# Altium PCB STM32F303VCT6_PLC.PcbDoc (part 2 of 3)
Units mm, origin at the board's own origin, x right, y up, seen from the top; angles counter-clockwise.
Board outline 150 x 150 mm, 4 copper layers ([L1] TOP, [L2] GND, [L3] POWER, [L4] BOTTOM), stack 1.58 mm thick; 269 components, 235 nets, 934 pads, 331 vias.
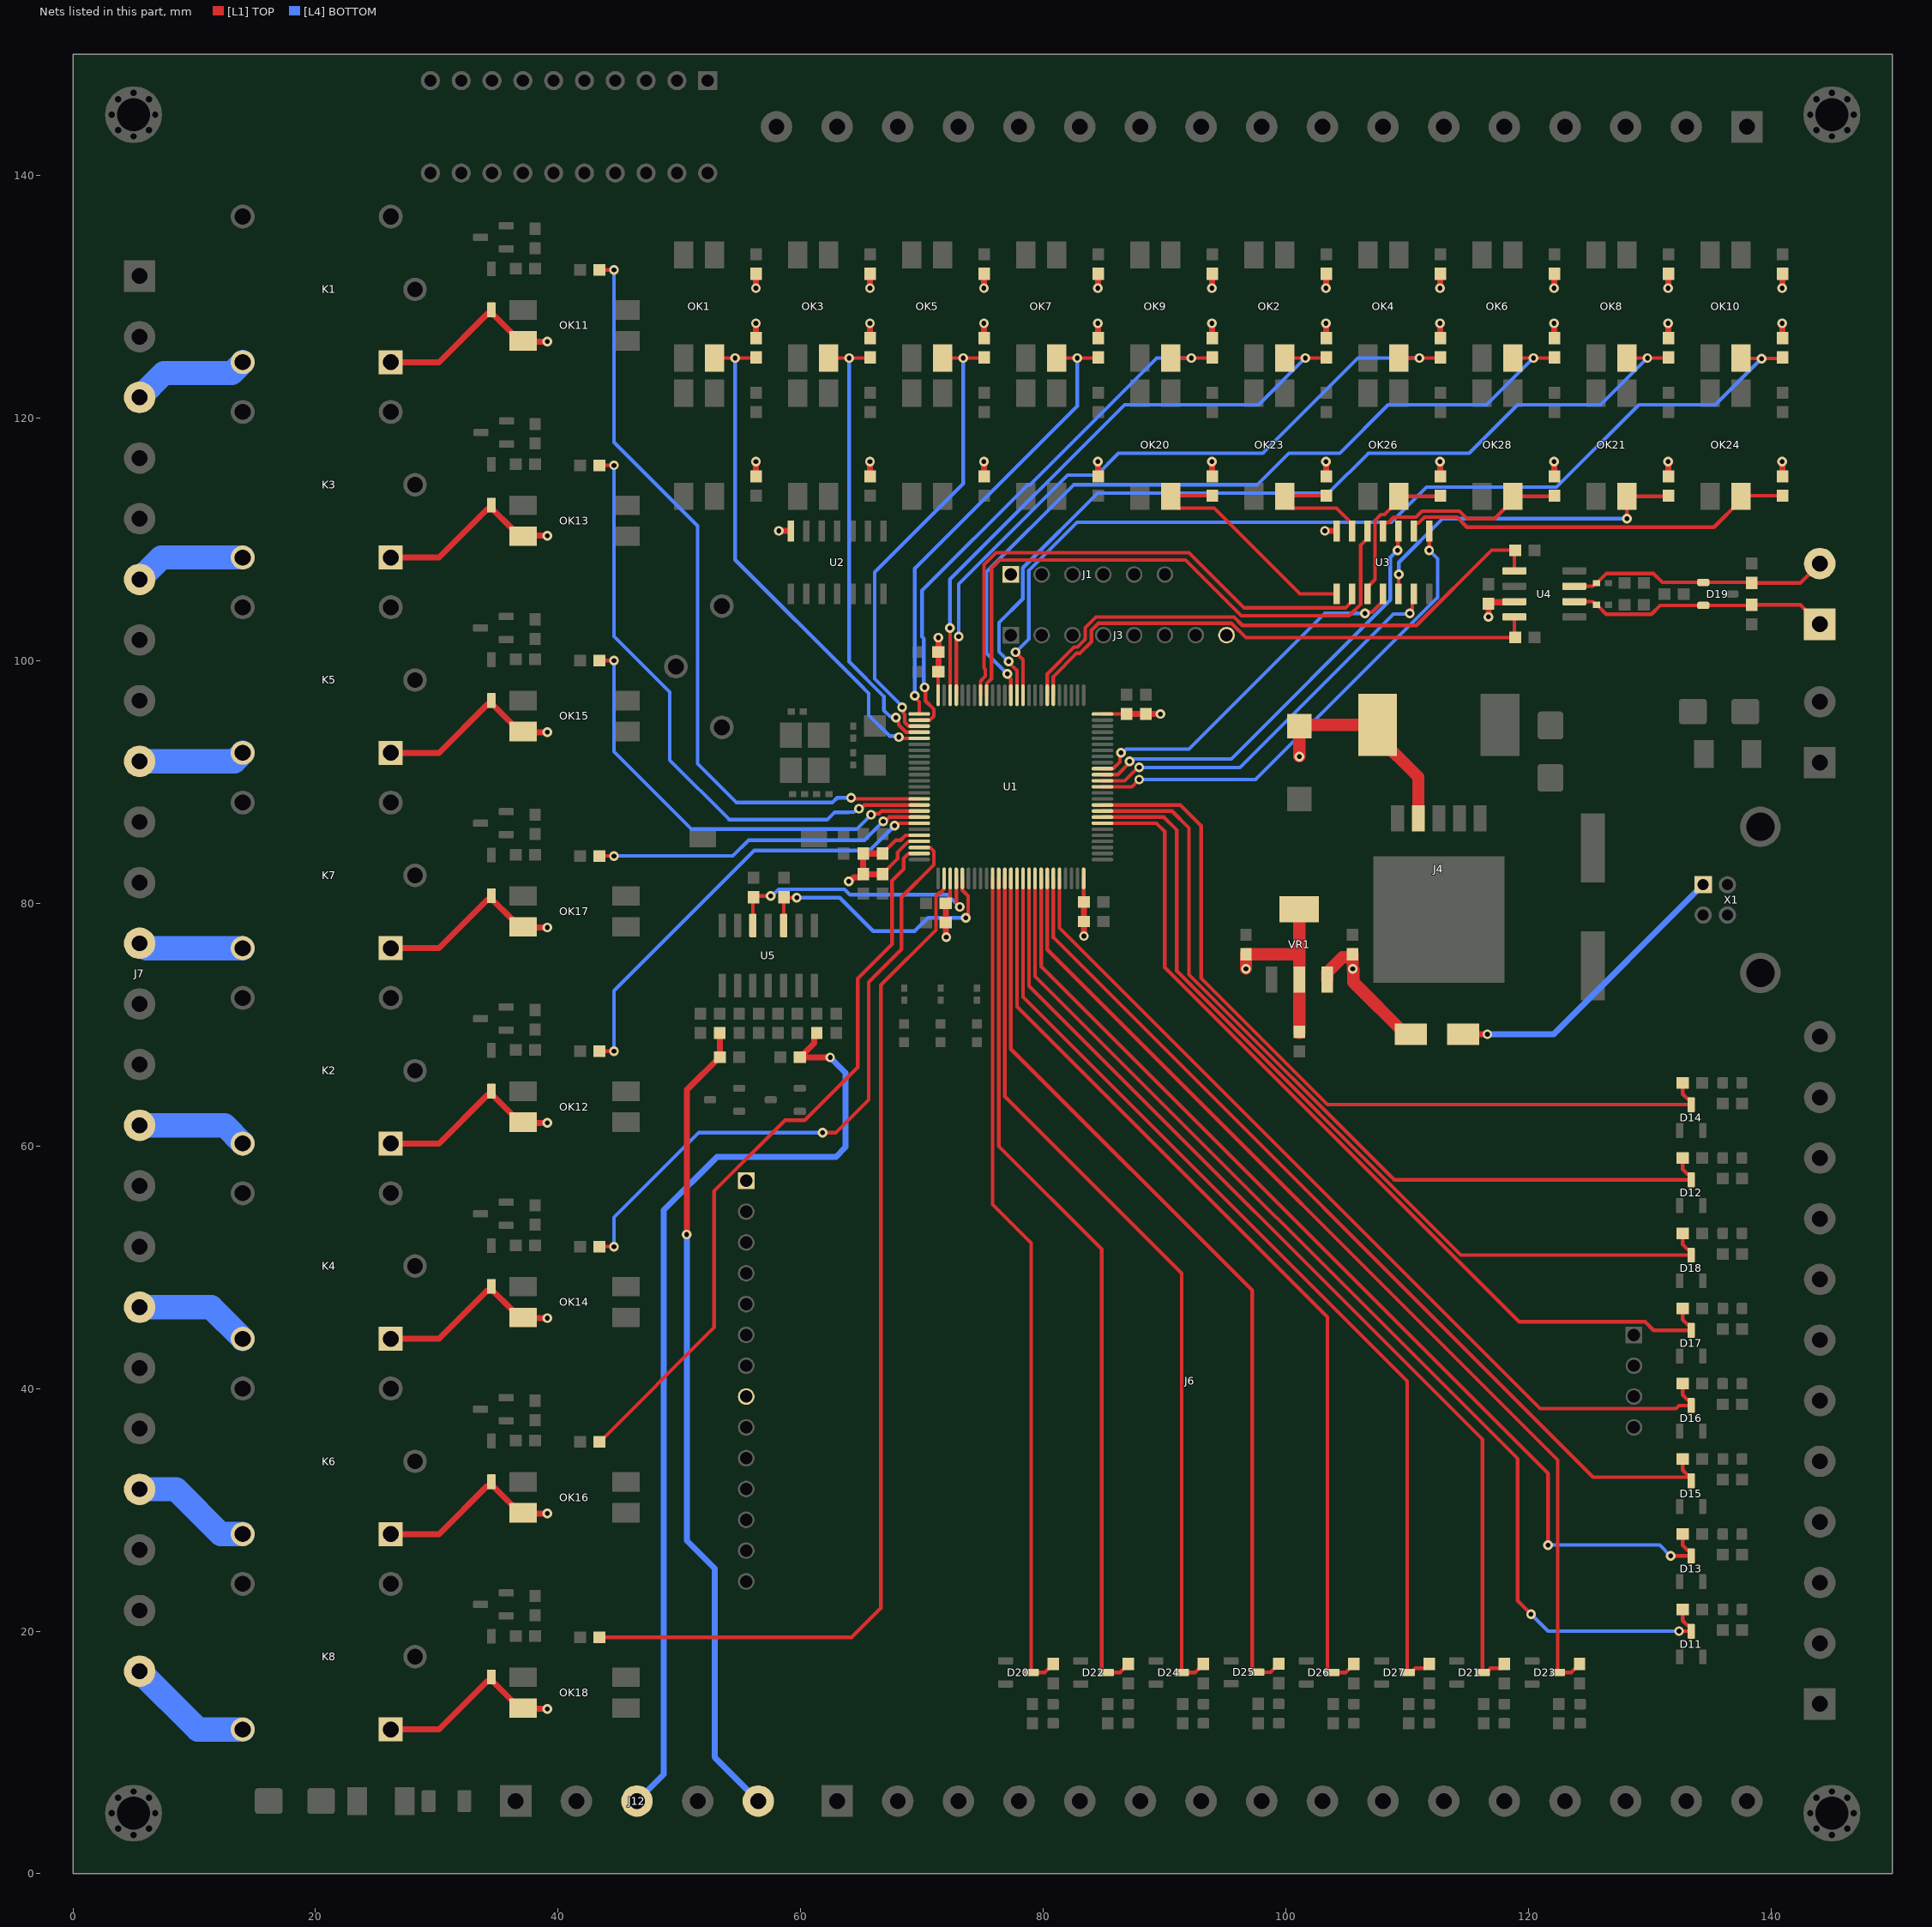
[diagram p4: the nets of this part, all layers, seen from the top]

## Part data
BT1: "THM (Vertical) Holder for 20mm Cel", Package=None, Check_prices=https://www.snapeda.com/parts/1074/Keystone/view-part/?ref=eda, MF="Keystone Electronics", MP=1074, SnapEDA_Link=https://www.snapeda.com/parts/1074/Keystone/view-part/?ref=snap
C1 C3 C5 C7 C17 C29 C30: "CAP, CERM, 100 nF, 25 V, +/- 10%, X7R, AEC-Q200 Grade 1, 0603", Cap_Case=0603, Manufacturer=MuRata, PartNumber=GCM188R70J225KE22D, Supplier Part Number 1=490-5316-1-ND, TempCo=X7R, Tolerance_%=10%, Value1=Unknown, Value2=6.3V, ValueDisplayed=100nF, AEC Category=Q200, AEC Grade=1, AEC Qualified=Y, Cap_F=2.2µF, ComponentLink1Description="Datasheet link", ComponentLink1URL=http://psearch.en.murata.com/capacitor/product/GCM188R70J225KE22%23.pdf, CompType=Capacitor, LatestRevisionDate=2017-03-09, MountType=SMT, PackageReference=0603, Polarized=N, Published=2008-06-19, Publisher="Texas Instruments", RoHS=Y, SizeArea_mm2=1.28, SizeAreaWB_mm2=4.68, SizeX_mm=1.6, SizeY_mm=0.8, SizeZ_mm=1, Supplier 1=Digi-Key, Supplier 2=Mouser, Supplier Part Number 2=81-GCM188R70J225KE2D, TaMax_C=125°C, TaMin_C=-55°C, Technology=Ceramic, U/M=EA, VDC_V=6.3V
C2 C4 C6 C8: "CAP, CERM, 4.7 uF, 10 V, +/- 10%, X7R, AEC-Q200 Grade 1, 0603", Cap_Case=0603, Manufacturer=MuRata, PartNumber=GCM188R70J225KE22D, Supplier Part Number 1=490-5316-1-ND, TempCo=X7R, Tolerance_%=10%, Value1=Unknown, Value2=6.3V, ValueDisplayed=4.7uF, AEC Category=Q200, AEC Grade=1, AEC Qualified=Y, Cap_F=2.2µF, ComponentLink1Description="Datasheet link", ComponentLink1URL=http://psearch.en.murata.com/capacitor/product/GCM188R70J225KE22%23.pdf, CompType=Capacitor, LatestRevisionDate=2017-03-09, MountType=SMT, PackageReference=0603, Polarized=N, Published=2008-06-19, Publisher="Texas Instruments", RoHS=Y, SizeArea_mm2=1.28, SizeAreaWB_mm2=4.68, SizeX_mm=1.6, SizeY_mm=0.8, SizeZ_mm=1, Supplier 1=Digi-Key, Supplier 2=Mouser, Supplier Part Number 2=81-GCM188R70J225KE2D, TaMax_C=125°C, TaMin_C=-55°C, Technology=Ceramic, U/M=EA, VDC_V=6.3V
C9 C10: library part "CAP 1uF 0603", "CAP, CERM, 1 uF, 16 V, +/- 10%, X7R, AEC-Q200 Grade 1, 0603", Cap_Case=0603, Manufacturer=MuRata, Supplier Part Number 1=490-5241-6-ND, TempCo=X7R, Tolerance_%=10%, Value1=Unknown, Value2=16V, ValueDisplayed=10uF, AEC Category=Q200, AEC Grade=1, AEC Qualified=Y, Cap_F=1µF, ComponentLink1Description="Datasheet link", ComponentLink1URL=http://psearch.en.murata.com/capacitor/product/GCM188R71C105KA64%23.pdf, CompType=Capacitor, LatestRevisionDate=2017-03-09, MountType=SMT, PackageReference=0603, PartNumber=GCM188R71C105KA64D, Polarized=N, Published=2008-06-19, Publisher="Texas Instruments", RoHS=Y, SizeArea_mm2=1.28, SizeAreaWB_mm2=4.68, SizeX_mm=1.6, SizeY_mm=0.8, SizeZ_mm=1, Supplier 1=Digi-Key, Supplier 2=Mouser, Supplier Part Number 2=81-GCM188R71C105K64D, TaMax_C=125°C, TaMin_C=-55°C, Technology=Ceramic, U/M=EA, VDC_V=16V
C11 C18: library part "CAP 10pF 0402 50V", "CAP, CERM, 10 pF, 50 V, +/- 5%, X7R, AEC-Q200 Grade 1, 0402", Cap_Case=0402, Manufacturer=TDK, Supplier Part Number 1=445-6899-1-ND, TempCo=X7R, Tolerance_%=10%, Value1="0.039064 ohm", Value2=50V, ValueDisplayed=10pF, AEC Category=Q200, AEC Grade=1, AEC Qualified=Y, Cap_F=100nF, ComponentLink1Description="Datasheet link", ComponentLink1URL=https://product.tdk.com/en/search/capacitor/ceramic/mlcc/info?part_no=CGA2B3X7R1H104K050BB, CompType=Capacitor, ESR_ohm=0.039064, IRMS_A=8.14669dA, LatestRevisionDate=2017-03-09, MountType=SMT, PackageReference=0402, PartNumber=CGA2B3X7R1H104K050BB, Polarized=N, Published=2008-06-19, Publisher="Texas Instruments", RoHS=Y, SizeArea_mm2=0.5, SizeAreaWB_mm2=3, SizeX_mm=1, SizeY_mm=0.5, SizeZ_mm=0.6, Supplier 1=Digi-Key, Supplier 2=Newark, Supplier 3=Mouser, Supplier Part Number 2=04X3148, Supplier Part Number 3=810-CGA2B3X7R1H104K, TaMax_C=125°C, TaMin_C=-55°C, Technology=Ceramic, U/M=EA, VDC_V=50V
C12 C19: library part "CAP 4.7pF 0402", "CAP, CERM, 4.7 pF, 50 V, +/- 2%, C0G/NP0, 0402", Cap_Case=0402, Manufacturer=MuRata, Supplier Part Number 1=490-8102-1-ND, TempCo=C0G/NP0, Tolerance_%=2%, Value1=Unknown, Value2=50V, ValueDisplayed=4.7pF, AEC Category=Q200, AEC Grade=N/A, AEC Qualified=N, Cap_F=4.7pF, ComponentLink1Description="Datasheet link", ComponentLink1URL=http://psearch.murata.com/capacitor/product/GJM1555C1H4R7BB01%23.pdf, CompType=Capacitor, LatestRevisionDate=2017-03-09, MountType=SMT, PackageReference=0402, PartNumber=GJM1555C1H4R7BB01D, Polarized=N, Published=2008-06-19, Publisher="Texas Instruments", RoHS=Y, SizeArea_mm2=0.5, SizeAreaWB_mm2=3, SizeX_mm=1, SizeY_mm=0.5, SizeZ_mm=0.6, Supplier 1=Digi-Key, Supplier 2=Mouser, Supplier Part Number 2=81-GJM1555C1H4R7BB01, TaMax_C=125°C, TaMin_C=-55°C, Technology=Ceramic, U/M=EA, VDC_V=50V
C13 C15 C22 C23 C24 C25 C26 C27: "CAP, CERM, 10 nF, 50 V, +/- 10%, X7R, AEC-Q200 Grade 1, 0603", Cap_Case=0603, Manufacturer=MuRata, PartNumber=GCM188R70J225KE22D, Supplier Part Number 1=490-5316-1-ND, TempCo=X7R, Tolerance_%=10%, Value1=Unknown, Value2=6.3V, ValueDisplayed=10nF, AEC Category=Q200, AEC Grade=1, AEC Qualified=Y, Cap_F=2.2µF, ComponentLink1Description="Datasheet link", ComponentLink1URL=http://psearch.en.murata.com/capacitor/product/GCM188R70J225KE22%23.pdf, CompType=Capacitor, LatestRevisionDate=2017-03-09, MountType=SMT, PackageReference=0603, Polarized=N, Published=2008-06-19, Publisher="Texas Instruments", RoHS=Y, SizeArea_mm2=1.28, SizeAreaWB_mm2=4.68, SizeX_mm=1.6, SizeY_mm=0.8, SizeZ_mm=1, Supplier 1=Digi-Key, Supplier 2=Mouser, Supplier Part Number 2=81-GCM188R70J225KE2D, TaMax_C=125°C, TaMin_C=-55°C, Technology=Ceramic, U/M=EA, VDC_V=6.3V
C14 C16: library part "CAP 1uF 0603", "CAP, CERM, 1 uF, 16 V, +/- 10%, X7R, AEC-Q200 Grade 1, 0603", Cap_Case=0603, Manufacturer=MuRata, Supplier Part Number 1=490-5241-6-ND, TempCo=X7R, Tolerance_%=10%, Value1=Unknown, Value2=16V, ValueDisplayed=1uF, AEC Category=Q200, AEC Grade=1, AEC Qualified=Y, Cap_F=1µF, ComponentLink1Description="Datasheet link", ComponentLink1URL=http://psearch.en.murata.com/capacitor/product/GCM188R71C105KA64%23.pdf, CompType=Capacitor, LatestRevisionDate=2017-03-09, MountType=SMT, PackageReference=0603, PartNumber=GCM188R71C105KA64D, Polarized=N, Published=2008-06-19, Publisher="Texas Instruments", RoHS=Y, SizeArea_mm2=1.28, SizeAreaWB_mm2=4.68, SizeX_mm=1.6, SizeY_mm=0.8, SizeZ_mm=1, Supplier 1=Digi-Key, Supplier 2=Mouser, Supplier Part Number 2=81-GCM188R71C105K64D, TaMax_C=125°C, TaMin_C=-55°C, Technology=Ceramic, U/M=EA, VDC_V=16V
C20: library part "CAP ALUMINUM", "CAPACITOR ALUM ELEC, 330UF, 20%, 35V, SMD; Product Range:PANASONIC - TK Series; Capacitance:330ÂµF; Capacitance Tolerance:Â± 20%; Capacitor Case Style:SMD; Diameter:12.5mm; ESR:0.12ohm; Height:13.5mm; Operating Temperature Max:125Â°C ;RoHS Compliant: Yes", Package="RADIAL-2 Panasonic", Availability="No availability data", Check_prices=https://www.snapeda.com/parts/EEETK1V331AQ/Panasonic/view-part/5787067/?ref=eda, MF=Panasonic, MP=EEETK1V331AQ, Price=None, SnapEDA_Link=https://www.snapeda.com/parts/EEETK1V331AQ/Panasonic/view-part/5787067/?ref=snap
C21: library part "CAP ALUMINUM 8X10.5MM", "Aluminum Electrolytic Capacitors, FT-V (????????) Series, 470uF +/- 20%, 25V, Surface mount type(8x10.5mm) Vibration-proof product", Package="RADIAL-2 Panasonic", Check_prices=https://www.snapeda.com/parts/EEE-FT1E471AV/Panasonic/view-part/?ref=eda, MF=Panasonic, MP=EEE-FT1E471AV, SnapEDA_Link=https://www.snapeda.com/parts/EEE-FT1E471AV/Panasonic/view-part/?ref=snap
C28: library part "CAP 10uF 1206", Cap_Case=1210, Manufacturer=TDK, Supplier Part Number 1=445-5720-1-ND, TempCo=X7R, Tolerance_%=20%, Value1=Unknown, Value2=25V, ValueDisplayed=10uF, AEC Category=Q200, AEC Grade=1, AEC Qualified=Y, Cap_F=10µF, ComponentLink1Description="Datasheet link", ComponentLink1URL=http://product.tdk.com/en/catalog/datasheets/mlcc_automotive_general_en.pdf, CompType=Capacitor, LatestRevisionDate=2017-03-09, MountType=SMT, PackageReference=1210, PartNumber=CGA6P1X7R1E106M250AC, Polarized=N, Published=2008-06-19, Publisher="Texas Instruments", RoHS=Y, SizeArea_mm2=8, SizeAreaWB_mm2=14.7, SizeX_mm=3.2, SizeY_mm=2.5, SizeZ_mm=2.8, Supplier 1=Digi-Key, Supplier 2=Mouser, Supplier Part Number 2=810-CGA6P1X7R1E106M, TaMax_C=125°C, TaMin_C=-55°C, Technology=Ceramic, U/M=EA, VDC_V=25V
D1 D28: "Diode Schottky 40V 2A Surface Mount DO-214AA (SMB)", Package="DO-214AA ON Semiconductor", Availability="In Stock", Check_prices=https://www.snapeda.com/parts/SS24/Onsemi/view-part/?ref=eda, MF="ON Semiconductor", MP=SS24, Price=None, SnapEDA_Link=https://www.snapeda.com/parts/SS24/Onsemi/view-part/?ref=snap
D2: library part SS24, "Diode Schottky 40V 2A Surface Mount DO-214AA (SMB)", Package="DO-214AA ON Semiconductor", Availability="In Stock", Check_prices=https://www.snapeda.com/parts/SS24/Onsemi/view-part/?ref=eda, MF="ON Semiconductor", MP=SS24, Price=None, SnapEDA_Link=https://www.snapeda.com/parts/SS24/Onsemi/view-part/?ref=snap
D3 D4 D5 D6 D7 D8 D9 D10: "Diode Standard 100 V 300mA (DC) Surface Mount SOD-123", Package="SOD-123 Fairchild Semiconductor", Check_prices=https://www.snapeda.com/parts/1N4148W-7/Diodes+Inc./view-part/?ref=eda, MF="Diodes Inc.", MP=1N4148W-7, SnapEDA_Link=https://www.snapeda.com/parts/1N4148W-7/Diodes+Inc./view-part/?ref=snap
D11 D12 D13 D14 D15 D16 D17 D18 D20 D21 D22 D23 D24 D25 D26 D27 J1 J3: Package=None, Availability=Unavailable, Price=None
  D11 D12 D13 D14 D15 D16 D17 D18 D20 D21 D22 D23 D24 D25 D26 D27: MP=BZX84C10LT1G
  J1: MF="Samtec Inc.", MP=TSW-106-07-L-S
  J3: MF="Samtec Inc.", MP=TSW-108-07-L-S
D19: library part PESD5V0L2BT,215
DS1 DS2 DS3: library part "LED RED SMD", "LED, Red, SMD", Color=Red, Manufacturer=OSRAM, Value1=W, Value2=1.8V, Angle=160, ComponentLink1Description="Datasheet link", ComponentLink1URL=http://www.osram-os.com/Graphics/XPic2/00077099_0.pdf, CompType=LED, Io_A=20mA, MountType=SMT, PackageReference="SMD, 2-Leads, Body 1.3x0.8mm", PartNumber="LS L29K-G1J2-1-Z", RoHS=Y, TJmax_C=110°C, Type=?, Vf_V=1.8V, Vr_V=12V
F1 F18: library part "FUSE 1808", "Fuse, 5 A, 32VAC/VDC, SMD", Irating_A=5A, Manufacturer=Littelfuse, Supplier Part Number 1=F1608CT-ND, ComponentLink1Description="Datasheet URL", ComponentLink1URL=http://www.littelfuse.com/~/media/electronics/datasheets/fuses/littelfuse_fuse_440_datasheet.pdf.pdf, CompType=Fuse, Interrupt_AC=50A, Interrupt_DC=50A, MeltingTyp=4.761, MountType=SMT, PackageReference=1206, PartNumber=0440005.WR, RoHS=Y, Rtyp_Ohm=0.012, SizeArea_mm2=5.12, SizeAreaWB_mm2=10.92, SizeX_mm=3.2, SizeY_mm=1.6, SizeZ_mm=1.35, Supplier 1=Digi-Key, Supplier 2=Newark, Supplier 3=Mouser, Supplier Part Number 2=64R8013, Supplier Part Number 3=576-0440005.WR, VAC_V=32V, VDC_V=32V
F2 F3 F4 F5 F6 F7 F8 F9 F10 F11 F12 F13 F14 F15 F16 F17: library part "Polyfuse 0603"
J2: "Diode Schottky 40 V 1A Surface Mount DO-214AC (SMA)", Package="SMA-2 ON Semiconductor", Check_prices=https://www.snapeda.com/parts/SS14/Onsemi/view-part/?ref=eda, MF=ON, MP=SS14, SnapEDA_Link=https://www.snapeda.com/parts/SS14/Onsemi/view-part/?ref=snap
J4: Package=Package, Check_prices=https://www.snapeda.com/parts/LM2596/Texas+Instruments/view-part/?ref=eda, MF="Texas Instruments", MP=LM2596, SnapEDA_Link=https://www.snapeda.com/parts/LM2596/Texas+Instruments/view-part/?ref=snap
J6: "LCD 2.4inch 240x320", Package=None, Availability=Unavailable, MF="Samtec Inc.", MP=TSW-108-07-L-S, Price=None
K1 K2 K3 K4 K5 K6 K7 K8: "5V Trigger Relay Module For Arduino And Raspberry Pi 5V Trigger Relay Module For Arduino And Raspberry Pi", Package="NON STANDARD-5 Songle Relay", Availability="Not in stock", Check_prices=https://www.snapeda.com/parts/SRD-05VDC-SL-C/Songle+Relay/view-part/?ref=eda, MF="Songle Relay", MP=SRD-05VDC-SL-C, Price=None, SnapEDA_Link=https://www.snapeda.com/parts/SRD-05VDC-SL-C/Songle+Relay/view-part/?ref=snap
L1: library part CDRH127_LDNP-221MC, "220 ÂµH Shielded - Inductor 1.45 A 338mOhm Max Nonstandard", Package="Nonstandard Sumida", Check_prices=https://www.snapeda.com/parts/CDRH127/LDNP-221MC/Sumida+America+Components+Inc./view-part/?ref=eda, MF="Sumida America", MP=CDRH127/LDNP-221MC, SnapEDA_Link=https://www.snapeda.com/parts/CDRH127/LDNP-221MC/Sumida+America+Components+Inc./view-part/?ref=snap
OK1 OK2 OK3 OK4 OK5 OK6 OK7 OK8 OK9 OK10 OK11 OK12 OK13 OK14 OK15 OK16 OK17 OK18 OK19 OK20 OK21 OK22 OK23 OK24 OK25 OK26 OK27 OK28: "RF Mixer IC Cellular, DCS, PCS, W-CDMA, WLAN Up Converter 50MHz ~ 400MHz 6-SuperMiniMold", Package=None, Check_prices=https://www.snapeda.com/parts/PC817/Renesas/view-part/?ref=eda, MF="Renesas Electronics America Inc", MP=PC817, SnapEDA_Link=https://www.snapeda.com/parts/PC817/Renesas/view-part/?ref=snap
Q1 Q2 Q3 Q4 Q5 Q6 Q7 Q8: "Mosfet Array 2 N-Channel (Dual) 60V 300mA 500mW Surface Mount PG-SOT363-6", Package="SOT-23-3 ON Semiconductor", Check_prices=https://www.snapeda.com/parts/2N7002/Onsemi/view-part/?ref=eda, MF=onsemi, MP=2N7002, SnapEDA_Link=https://www.snapeda.com/parts/2N7002/Onsemi/view-part/?ref=snap
R1: library part "RES 1.5K 0603 1%", "RES, 1.5K, 1%, 0.1 W, AEC-Q200 Grade 0, 0603", Manufacturer=Vishay-Dale, PartNumber=CRCW060320R0JNEA, Power_W=100mW, Supplier Part Number 1=541-20GCT-ND, TempCo="200 ppm/C", Tolerance_%=5%, Value2=0.1W, Value_Code=20R0, ValueDisplayed=1.5k, AEC Category=Q200, AEC Grade=0, AEC Qualified=Y, ComponentLink1Description="Datasheet link", ComponentLink1URL=http://www.vishay.com/docs/20035/dcrcwe3.pdf, CompType=Resistor, EIA_Code=E24, MountType=SMT, PackageReference=0603, Res_ohm=20, RoHS=E, SizeArea_mm2=1.28, SizeX_mm=1.6, SizeY_mm=0.8, SizeZ_mm=1, Supplier 1=Digi-Key, Supplier 2=Newark, Supplier 3=Mouser, Supplier Part Number 2=59M6784, Supplier Part Number 3=71-CRCW0603J-20-E3, Technology="Thick Film", Value1=5%, VDC_V=75V
R2: library part "RES 2K 0402", "RES, 2.00 k, 5%, 0.063 W, AEC-Q200 Grade 0, 0402", Manufacturer=Vishay-Dale, Power_W=63mW, Supplier Part Number 1=541-1.00KLCT-ND, TempCo="100 ppm/C", Tolerance_%=1%, Value2=0.063W, Value_Code=1k00, ValueDisplayed=2.00k, AEC Category=Q200, AEC Grade=0, AEC Qualified=Y, ComponentLink1Description="Datasheet link", ComponentLink1URL=http://www.vishay.com/docs/20035/dcrcwe3.pdf, CompType=Resistor, EIA_Code=E96, MountType=SMT, PackageReference=0402, PartNumber=CRCW04021K00FKED, Res_ohm=1k, RoHS=E, SizeArea_mm2=0.5, SizeX_mm=1, SizeY_mm=0.5, SizeZ_mm=0.6, Supplier 1=Digi-Key, Supplier 2=Newark, Supplier 3=Mouser, Supplier Part Number 2=52K6545, Supplier Part Number 3=71-CRCW0402-1.0K-E3, Technology="Thick Film", Value1=1%, VDC_V=50V
R3 R4 R5 R6 R7 R8 R9 R10 R11 R12 R13 R14 R15 R16 R17 R18 R19 R20 R21 R22: library part "RES 1.5K 0603 1%", "RES, 1.5K, 1%, 0.1 W, AEC-Q200 Grade 0, 0603", Manufacturer=Vishay-Dale, PartNumber=CRCW060320R0JNEA, Power_W=100mW, Supplier Part Number 1=541-20GCT-ND, TempCo="200 ppm/C", Tolerance_%=5%, Value2=0.1W, Value_Code=20R0, ValueDisplayed=1k, AEC Category=Q200, AEC Grade=0, AEC Qualified=Y, ComponentLink1Description="Datasheet link", ComponentLink1URL=http://www.vishay.com/docs/20035/dcrcwe3.pdf, CompType=Resistor, EIA_Code=E24, MountType=SMT, PackageReference=0603, Res_ohm=20, RoHS=E, SizeArea_mm2=1.28, SizeX_mm=1.6, SizeY_mm=0.8, SizeZ_mm=1, Supplier 1=Digi-Key, Supplier 2=Newark, Supplier 3=Mouser, Supplier Part Number 2=59M6784, Supplier Part Number 3=71-CRCW0603J-20-E3, Technology="Thick Film", Value1=5%, VDC_V=75V
R23 R24 R25 R26 R29 R30 R31 R32 R35 R36 R37 R38 R41 R42 R43 R44: library part "RES 10K 0603 1%", "RES, 10K, 1%, 0.1 W, AEC-Q200 Grade 0, 0603", Manufacturer=Vishay-Dale, PartNumber=CRCW060320R0JNEA, Power_W=100mW, Supplier Part Number 1=541-20GCT-ND, TempCo="200 ppm/C", Tolerance_%=5%, Value2=0.1W, Value_Code=20R0, ValueDisplayed=1k, AEC Category=Q200, AEC Grade=0, AEC Qualified=Y, ComponentLink1Description="Datasheet link", ComponentLink1URL=http://www.vishay.com/docs/20035/dcrcwe3.pdf, CompType=Resistor, EIA_Code=E24, MountType=SMT, PackageReference=0603, Res_ohm=20, RoHS=E, SizeArea_mm2=1.28, SizeX_mm=1.6, SizeY_mm=0.8, SizeZ_mm=1, Supplier 1=Digi-Key, Supplier 2=Newark, Supplier 3=Mouser, Supplier Part Number 2=59M6784, Supplier Part Number 3=71-CRCW0603J-20-E3, Technology="Thick Film", Value1=5%, VDC_V=75V
R27 R28 R33 R34 R39 R40 R45 R46 R103 R105 R106 R107 R108 R110 R111 R112: library part "RES 10K 0603 1%", "RES, 10K, 1%, 0.1 W, AEC-Q200 Grade 0, 0603", Manufacturer=Vishay-Dale, PartNumber=CRCW060320R0JNEA, Power_W=100mW, Supplier Part Number 1=541-20GCT-ND, TempCo="200 ppm/C", Tolerance_%=5%, Value2=0.1W, Value_Code=20R0, ValueDisplayed=10k, AEC Category=Q200, AEC Grade=0, AEC Qualified=Y, ComponentLink1Description="Datasheet link", ComponentLink1URL=http://www.vishay.com/docs/20035/dcrcwe3.pdf, CompType=Resistor, EIA_Code=E24, MountType=SMT, PackageReference=0603, Res_ohm=20, RoHS=E, SizeArea_mm2=1.28, SizeX_mm=1.6, SizeY_mm=0.8, SizeZ_mm=1, Supplier 1=Digi-Key, Supplier 2=Newark, Supplier 3=Mouser, Supplier Part Number 2=59M6784, Supplier Part Number 3=71-CRCW0603J-20-E3, Technology="Thick Film", Value1=5%, VDC_V=75V
R47 R48 R49 R50 R51 R52 R53 R54 R55 R56 R57 R58 R59 R60 R61 R62 R87 R88 R89 R90 R91 R92 R93 R94 R95 R96 R97 R98 R99 R100 R101 R102 R104 R109: library part "RES 160R 0603", "RES, 160, 5%, 0.1 W, AEC-Q200 Grade 0, 0603", Manufacturer=Vishay-Dale, Power_W=100mW, Supplier Part Number 1=541-20GCT-ND, TempCo="200 ppm/C", Tolerance_%=5%, Value2=0.1W, Value_Code=20R0, ValueDisplayed=160, AEC Category=Q200, AEC Grade=0, AEC Qualified=Y, ComponentLink1Description="Datasheet link", ComponentLink1URL=http://www.vishay.com/docs/20035/dcrcwe3.pdf, CompType=Resistor, EIA_Code=E24, MountType=SMT, PackageReference=0603, PartNumber=CRCW060320R0JNEA, Res_ohm=20, RoHS=E, SizeArea_mm2=1.28, SizeX_mm=1.6, SizeY_mm=0.8, SizeZ_mm=1, Supplier 1=Digi-Key, Supplier 2=Newark, Supplier 3=Mouser, Supplier Part Number 2=59M6784, Supplier Part Number 3=71-CRCW0603J-20-E3, Technology="Thick Film", Value1=5%, VDC_V=75V
R63 R64 R65 R66 R67 R68 R69 R70 R71 R72 R73 R74 R75 R76 R77 R78 R79 R80 R81 R82: library part "RES 0R 0603", "RES, 0, 5%, 0.125 W, 0603", Manufacturer=Vishay/Beyschlag, Power_W=125mW, Supplier Part Number 1=MCT0603-0.0-ZZCT-ND, TempCo=ppm/C, Tolerance_%=5%, Value2=0.125W, Value_Code=0000, ValueDisplayed=1k, AEC Category=Q200, AEC Grade=N/A, AEC Qualified=N, ComponentLink1Description="Datasheet link", ComponentLink1URL=http://www.vishay.com/docs/28705/mcx0x0xpro.pdf, CompType=Resistor, EIA_Code=E24, LatestRevisionDate=2017-03-09, MountType=SMT, PackageReference=0603, PartNumber=MCT06030Z0000ZP500, Published=2008-06-26, Publisher="Texas Instruments", Res_ohm=0, RoHS=Y, SizeArea_mm2=1.28, SizeX_mm=1.6, SizeY_mm=0.8, SizeZ_mm=1, Supplier 1=Digi-Key, Supplier 2=Newark, Supplier 3=Mouser, Supplier Part Number 2=96Y9454, Supplier Part Number 3=594-MCT06030Z0000ZP5, Technology="Thin Film", U/M=EA, Value1=5%
R83 R86: library part "RES 0R 0402 0.1W", "RES, 0, 5%, 0.1 W, AEC-Q200 Grade 0, 0402", Manufacturer=Panasonic, Power_W=100mW, Supplier Part Number 1=P0.0JCT-ND, TempCo="600 ppm/C", Tolerance_%=5%, Value2=0.1W, Value_Code=0000, ValueDisplayed=0, AEC Category=Q200, AEC Grade=0, AEC Qualified=Y, ComponentLink1Description="Datasheet link", ComponentLink1URL=https://industrial.panasonic.com/cdbs/www-data/pdf/RDA0000/AOA0000C301.pdf, CompType=Resistor, EIA_Code=E24, MountType=SMT, PackageReference=0402, PartNumber=ERJ-2GE0R00X, Res_ohm=0, RoHS=Y, SizeArea_mm2=0.5, SizeAreaWB_mm2=3, SizeX_mm=1, SizeY_mm=0.5, SizeZ_mm=0.6, Supplier 1=Digi-Key, Supplier 2=Newark, Supplier 3=Mouser, Supplier Part Number 2=65T8307, Supplier Part Number 3=667-ERJ-2GE0R00X, Technology="Thick Film", Value1=5%, VDC_V=50V
R84 R85: library part "RES 60R 0603", "RES, 60, 5%, 0.125 W, 0603", Manufacturer=Vishay/Beyschlag, Power_W=125mW, Supplier Part Number 1=MCT0603-0.0-ZZCT-ND, TempCo=ppm/C, Tolerance_%=5%, Value2=0.125W, Value_Code=0000, ValueDisplayed=60, AEC Category=Q200, AEC Grade=N/A, AEC Qualified=N, ComponentLink1Description="Datasheet link", ComponentLink1URL=http://www.vishay.com/docs/28705/mcx0x0xpro.pdf, CompType=Resistor, EIA_Code=E24, LatestRevisionDate=2017-03-09, MountType=SMT, PackageReference=0603, PartNumber=MCT06030Z0000ZP500, Published=2008-06-26, Publisher="Texas Instruments", Res_ohm=0, RoHS=Y, SizeArea_mm2=1.28, SizeX_mm=1.6, SizeY_mm=0.8, SizeZ_mm=1, Supplier 1=Digi-Key, Supplier 2=Newark, Supplier 3=Mouser, Supplier Part Number 2=96Y9454, Supplier Part Number 3=594-MCT06030Z0000ZP5, Technology="Thin Film", U/M=EA, Value1=5%
R113 R114 R115: library part "RES 1K 0402", "RES, 1.00 k, 1%, 0.063 W, AEC-Q200 Grade 0, 0402", Manufacturer=Vishay-Dale, Power_W=63mW, Supplier Part Number 1=541-1.00KLCT-ND, TempCo="100 ppm/C", Tolerance_%=1%, Value2=0.063W, Value_Code=1k00, ValueDisplayed=220, AEC Category=Q200, AEC Grade=0, AEC Qualified=Y, ComponentLink1Description="Datasheet link", ComponentLink1URL=http://www.vishay.com/docs/20035/dcrcwe3.pdf, CompType=Resistor, EIA_Code=E96, MountType=SMT, PackageReference=0402, PartNumber=CRCW04021K00FKED, Res_ohm=1k, RoHS=E, SizeArea_mm2=0.5, SizeX_mm=1, SizeY_mm=0.5, SizeZ_mm=0.6, Supplier 1=Digi-Key, Supplier 2=Newark, Supplier 3=Mouser, Supplier Part Number 2=52K6545, Supplier Part Number 3=71-CRCW0402-1.0K-E3, Technology="Thick Film", Value1=1%, VDC_V=50V
S1: library part DS01-254-L-10BE, "10 Position, Through Hole, 2.54 mm Pitch, Raised Slide Actuator, Flat Bottom, Long Pin, DIP Switch", Package=None, Check_prices=https://www.snapeda.com/parts/DS01-254-L-10BE/Same+Sky/view-part/?ref=eda, MF="Same Sky", MP=DS01-254-L-10BE, SnapEDA_Link=https://www.snapeda.com/parts/DS01-254-L-10BE/Same+Sky/view-part/?ref=snap
U1: "Mainstream Mixed signals MCUs Arm Cortex-M4 core with DSP and FPU, 256 Kbytes of Flash memory, 72 MHz CPU, MPU, CCM, 12-bit ADC 5 MSPS, PGA, comparators", Manufacturer_Name=STMicroelectronics, Copyright="Copyright (C) 2025 Ultra Librarian. All rights reserved.", Manufacturer_Part_Number=STM32F303VCT6, RefDes=RefDes, Type=Type
U2 U3: "Inverter IC 6 Channel Schmitt Trigger 14-SOIC", Package="SO14-14 Nexperia USA Inc.", Check_prices=https://www.snapeda.com/parts/74HC14D/Toshiba/view-part/?ref=eda, MF=Toshiba, MP=74HC14D, SnapEDA_Link=https://www.snapeda.com/parts/74HC14D/Toshiba/view-part/?ref=snap
U4: library part SN65HVD230DR_1, "3.3-V CAN Transceivers", Package="SOIC-8 Texas Instruments", Check_prices=https://www.snapeda.com/parts/TCAN332DR/Texas+Instruments/view-part/?ref=eda, MF="Texas Instruments", MP=TCAN332DR, SnapEDA_Link=https://www.snapeda.com/parts/TCAN332DR/Texas+Instruments/view-part/?ref=snap
VR1: "800-mA 15-V linear voltage regulator", Package="SOT-223-4 Texas Instruments", Check_prices=https://www.snapeda.com/parts/LM1117IMP-3.3/NOPB/Texas+Instruments/view-part/?ref=eda, MF="Texas Instruments", MP=LM1117IMP-3.3/NOPB, SnapEDA_Link=https://www.snapeda.com/parts/LM1117IMP-3.3/NOPB/Texas+Instruments/view-part/?ref=snap
X1: "USB-B (USB TYPE-B) - Receptacle Connector 4 Position Through Hole, Right Angle", Package=None, Availability="In Stock", Check_prices=https://www.snapeda.com/parts/USB-B1HSB6/On+Shore+Technology+Inc./view-part/?ref=eda, MF="On Shore", MP=USB-B1HSB6, Price=None, Purchase-URL=https://pricing.snapeda.com/search/part/USB-B1HSB6/?ref=eda, SnapEDA_Link=https://www.snapeda.com/parts/USB-B1HSB6/On+Shore+Technology+Inc./view-part/?ref=snap

## Via types
v1: diameter 0.8, hole 0.4, [L1] TOP to [L4] BOTTOM, 300 vias
v2: diameter 0.6, hole 0.3, [L1] TOP to [L4] BOTTOM, 31 vias

## Nets (pads, with @x,y where several pads share a name; then routed paths per layer and width w, separated by ;. In a path a pad name is that pad's centre, name@x,y a point inside that pad or via, vN(x,y) a via of type N, cw(c..) or ccw(c..) an arc to the next point about the centre after c; other vN are vias at no path point)
+3.3V: C1.1 C2.1 C3.1 C4.1 C5.1 C6.1 C7.1 C8.1 C10.1 C13.1 C14.1 C15.1 C16.1 C23.2 J1.01 J3.08 J6.01 J6.08 R1.1 R4.2 R6.2 R8.2 R10.2 R12.2 R14.2 R16.2 R18.2 R20.2 R22.2 R63.2 R64.2 R65.2 R69.2 R70.2 R71.2 R75.2 R76.2 R79.2 R80.2 U1.21 U1.22 U1.28 U1.50 U1.75 U1.100 U2.14 U3.14 U4.3 VR1.2 VR1.4 | length 79.6
  [L1] TOP w0.3: C13.1@66.746,82.4 66.746,82.425 67.977,83.656 67.977,84.194 68.884,85.1 U1.22@69.77,85.1 ; C15.1@66.746,84.1 66.746,84.125 67.821,85.2 68.23,85.2 68.63,85.6 U1.21@69.77,85.6 ; U1.100@71.32,97.15 71.32,99.074 C7.1@71.346,99.1 ; C3.1@71.971,80 72.32,80.349 U1.28@72.32,82.05 ; U1.50@83.32,82.05 83.32,80.126 C5.1@83.346,80.1 ; U1.75@84.87,95.6 85.921,95.6 C1.1@86.846,95.6
  [L1] TOP w0.5: v1(56.3,116.4) 56.315,116.385 56.315,115.205 R63.2@56.33,115.19 ; v1(56.3,127.8) 56.315,127.785 56.315,126.605 R4.2@56.33,126.59 ; v1(58.2,110.7) 59.173,110.7 59.19,110.683 U2.14@59.19,110.681 ; v1(63.946,81.8) 64.027,81.8 64.377,82.15 64.921,82.15 65.146,82.375 C14.1@65.146,82.4 ; v1(65.7,116.4) 65.715,116.385 65.715,115.205 R69.2@65.73,115.19 ; v1(65.7,127.8) 65.715,127.785 65.715,126.605 R8.2@65.73,126.59 ; C13.1@66.746,82.4 C14.1@65.146,82.4 ; C15.1@66.746,84.1 C16.1@65.146,84.1 C14.1@65.146,82.4 ; C7.1@71.346,99.1 C8.1@71.346,100.7 v1(71.346,101.9) ; C3.1@71.946,80 C4.1@71.946,78.4 71.973,78.373 71.973,77.227 v1(72,77.2) ; v1(75.1,116.4) 75.115,116.385 75.115,115.205 R75.2@75.13,115.19 ; v1(75.1,127.8) 75.115,127.785 75.115,126.605 R12.2@75.13,126.59 ; v1(83.346,77.3) C6.1@83.346,78.5 C5.1@83.346,80.1 ; v1(84.5,116.4) 84.515,116.385 84.515,115.205 R79.2@84.53,115.19 ; v1(84.5,127.8) 84.515,127.785 84.515,126.605 R16.2@84.53,126.59 ; C1.1@86.846,95.6 v1(89.646,95.6) ; v1(93.9,116.4) 93.915,116.385 93.915,115.205 R64.2@93.93,115.19 ; v1(93.9,127.8) 93.915,127.785 93.915,126.605 R20.2@93.93,126.59 ; v1(103.2,110.7) 104.173,110.7 104.19,110.683 U3.14@104.19,110.681 ; v1(103.3,116.4) 103.315,116.385 103.315,115.205 R70.2@103.33,115.19 ; v1(103.3,127.8) 103.315,127.785 103.315,126.605 R6.2@103.33,126.59 ; v1(112.7,116.4) 112.715,116.385 112.715,115.205 R76.2@112.73,115.19 ; v1(112.7,127.8) 112.715,127.785 112.715,126.605 R10.2@112.73,126.59 ; v1(116.7,103.6) C23.2@116.7,104.7 116.815,104.815 118.78,104.815 U4.3@118.83,104.865 ; v1(122.1,116.4) 122.115,116.385 122.115,115.205 R80.2@122.13,115.19 ; v1(122.1,127.8) 122.115,127.785 122.115,126.605 R14.2@122.13,126.59 ; v1(131.5,116.4) 131.515,116.385 131.515,115.205 R65.2@131.53,115.19 ; v1(131.5,127.8) 131.515,127.785 131.515,126.605 R18.2@131.53,126.59 ; v1(140.9,116.4) 140.915,116.385 140.915,115.205 R71.2@140.93,115.19 ; v1(140.9,127.8) 140.915,127.785 140.915,126.605 R22.2@140.93,126.59
  [L1] TOP w1: v1(96.7,74.6) C10.1@96.7,75.8 100.6,75.8 101.1,76.3 ; R1.1@101.1,69.3 VR1.2@101.1,73.7 101.1,76.3 ; VR1.4@101.1,79.5 101.1,76.3
+5V: C9.1 C21.1 D3.C D4.C D5.C D6.C D7.C D8.C D9.C D10.C J2.P2 J4.4 K1.A1 K2.A1 K3.A1 K4.A1 K5.A1 K6.A1 K7.A1 K8.A1 L1.2 OK11.4 OK12.4 OK13.4 OK14.4 OK15.4 OK16.4 OK17.4 OK18.4 R3.2 R5.2 R7.2 R9.2 R11.2 R13.2 R15.2 R17.2 R19.2 R21.2 VR1.3 | length 169
  [L1] TOP w0.5: K8.A1@26.2,11.9 30.18,11.9 34.145,15.865 34.385,15.865 D10.C@34.5,15.98 ; K6.A1@26.2,28 30.18,28 34.145,31.965 34.385,31.965 D8.C@34.5,32.08 ; K4.A1@26.2,44.1 30.18,44.1 34.145,48.065 34.385,48.065 D6.C@34.5,48.18 ; K2.A1@26.2,60.2 30.18,60.2 34.145,64.165 34.385,64.165 D4.C@34.5,64.28 ; K7.A1@26.2,76.3 30.18,76.3 34.145,80.265 34.385,80.265 D9.C@34.5,80.38 ; K5.A1@26.2,92.4 30.18,92.4 34.145,96.365 34.385,96.365 D7.C@34.5,96.48 ; K3.A1@26.2,108.5 30.18,108.5 34.145,112.465 34.385,112.465 D5.C@34.5,112.58 ; K1.A1@26.2,124.6 30.18,124.6 34.145,128.565 34.385,128.565 D3.C@34.5,128.68 ; D10.C@34.5,16.22 D10.C@34.5,15.98 ; D8.C@34.5,32.32 D8.C@34.5,32.08 ; D6.C@34.5,48.42 D6.C@34.5,48.18 ; D4.C@34.5,64.52 D4.C@34.5,64.28 ; D9.C@34.5,80.62 D9.C@34.5,80.38 ; D7.C@34.5,96.72 D7.C@34.5,96.48 ; D5.C@34.5,112.82 D5.C@34.5,112.58 ; D3.C@34.5,128.92 D3.C@34.5,128.68 ; v1(39.1,13.6) 37.16,13.6 OK18.4@37.1,13.66 36.775,13.66 36.225,14.21 36.225,14.255 D10.C@34.5,15.98 ; v1(39.1,29.7) 37.16,29.7 OK16.4@37.1,29.76 36.775,29.76 36.225,30.31 36.225,30.355 D8.C@34.5,32.08 ; v1(39.1,45.8) 37.16,45.8 OK14.4@37.1,45.86 36.775,45.86 36.225,46.41 36.225,46.455 D6.C@34.5,48.18 ; v1(39.1,61.9) 37.16,61.9 OK12.4@37.1,61.96 36.775,61.96 36.225,62.51 36.225,62.555 D4.C@34.5,64.28 ; v1(39.1,78) 37.16,78 OK17.4@37.1,78.06 36.775,78.06 36.225,78.61 36.225,78.655 D9.C@34.5,80.38 ; v1(39.1,94.1) 37.16,94.1 OK15.4@37.1,94.16 36.775,94.16 36.225,94.71 36.225,94.755 D7.C@34.5,96.48 ; v1(39.1,110.3) 37.14,110.3 OK13.4@37.1,110.26 36.775,110.26 36.225,110.81 36.225,110.855 D5.C@34.5,112.58 ; v1(39.1,126.3) 37.16,126.3 OK11.4@37.1,126.36 36.775,126.36 36.225,126.91 36.225,126.955 D3.C@34.5,128.68 ; v1(56.3,130.7) 56.315,130.715 56.315,131.875 R3.2@56.33,131.89 ; v1(65.7,130.7) 65.715,130.715 65.715,131.875 R7.2@65.73,131.89 ; v1(75.1,130.7) 75.115,130.715 75.115,131.875 R11.2@75.13,131.89 ; v1(84.5,130.7) 84.515,130.715 84.515,131.875 R15.2@84.53,131.89 ; v1(93.9,130.7) 93.915,130.715 93.915,131.875 R19.2@93.93,131.89 ; v1(103.3,130.7) 103.315,130.715 103.315,131.875 R5.2@103.33,131.89 ; v1(112.7,130.7) 112.715,130.715 112.715,131.875 R9.2@112.73,131.89 ; v1(122.1,130.7) 122.115,130.715 122.115,131.875 R13.2@122.13,131.89 ; v1(131.5,130.7) 131.515,130.715 131.515,131.875 R17.2@131.53,131.89 ; v1(140.9,130.7) 140.915,130.715 140.915,131.875 R21.2@140.93,131.89
  [L1] TOP w1: v1(101.1,92.1) C21.1@101.1,94.6 101.2,94.7 L1.2@107.55,94.7 107.55,93.75 110.899,90.401 J4.4@110.899,86.991 ; VR1.3@103.4,73.7 103.4,74.3 104.65,75.55 105.275,75.55 C9.1@105.5,75.775 ; C9.1@105.5,75.8 v1(105.5,74.6) 105.557,74.543 105.557,73.494 109.851,69.2 J2.P2@110.301,69.2
+VBUS: J2.P1 X1.1 | length 24.9
  [L1] TOP w0.5: J2.P1@114.601,69.2 v1(116.6,69.2)
  [L4] BOTTOM w0.5: v1(116.6,69.2) 122.06,69.2 X1.1@134.39,81.53
ADC0: D20.3 R87.2 U1.35 | length 68.9
  [L1] TOP w0.3: U1.35@75.82,82.05 75.82,79.3 75.82,55.18 79,52 D20.3@79,16.6 80.125,16.6 80.8,17.275 R87.2@80.8,17.3
ADC1: D22.3 R91.2 U1.36 | length 71.4
  [L1] TOP w0.3: U1.36@76.32,82.05 76.32,79.3 76.32,59.98 84.809,51.491 84.809,16.75 84.959,16.6 86.325,16.6 87,17.275 R91.2@87,17.3
ADC2: D24.3 R95.2 U1.37 | length 73.6
  [L1] TOP w0.3: U1.37@76.82,82.05 76.82,79.3 76.82,64.08 91.4,49.5 D24.3@91.4,16.6 92.525,16.6 93.2,17.275 R95.2@93.2,17.3
ADC3: D25.3 R97.2 U1.38 | length 76.1
  [L1] TOP w0.3: U1.38@77.32,82.05 77.32,79.3 77.32,67.98 97.21,48.09 97.21,16.763 97.36,16.613 98.726,16.613 99.401,17.288 R97.2@99.401,17.313
ADC4: D26.3 R99.2 U1.39 | length 78.5
  [L1] TOP w0.3: U1.39@77.82,82.05 77.82,79.3 77.82,71.48 103.409,45.891 103.409,16.75 103.559,16.6 104.925,16.6 105.6,17.275 R99.2@105.6,17.3
ADC5: D27.3 R101.2 U1.40 | length 80.3
  [L1] TOP w0.3: U1.40@78.32,82.05 78.32,79.3 78.32,72.28 110,40.6 D27.3@110,16.6 ; D27.3@110.383,16.667 110.665,16.95 111.475,16.95 111.8,17.275 R101.2@111.8,17.3
ADC6: D21.3 R88.2 U1.41 | length 83
  [L1] TOP w0.3: U1.41@78.82,82.05 78.82,73.18 116.2,35.8 D21.3@116.2,16.6 116.515,16.6 116.865,16.95 117.675,16.95 118,17.275 R88.2@118,17.3
ADC7: D23.3 R92.2 U1.44 | length 85
  [L1] TOP w0.3: U1.44@80.32,82.05 80.32,76.18 122.4,34.1 122.4,17.5 D23.3@122.4,16.6 123.525,16.6 124.2,17.275 R92.2@124.2,17.3
AO0: J12.3 R104.1 R107.2 | length 79.8
  [L1] TOP w0.5: R104.1@59.924,67.3 v1(62.424,67.3) ; R104.1@59.949,67.3 61.099,68.45 61.099,69.075 R107.2@61.324,69.3
  [L4] BOTTOM w0.5: J12.3@46.5,6 48.7,8.2 48.7,54.7 53.1,59.1 62.9,59.1 63.7,59.9 63.7,66.024 v1(62.424,67.3)
AO1: J12.5 R109.1 R112.2 | length 66.9
  [L1] TOP w0.5: v1(50.6,52.7) 50.624,52.724 50.624,64.625 R109.1@53.299,67.3 ; R109.1@53.324,67.3 R112.2@53.324,69.3
  [L4] BOTTOM w0.5: v1(50.6,52.7) 50.6,27.466 52.9,25.166 52.9,9.6 J12.5@56.5,6
CAN_N: C27.1 D19.2 J10.1 R86.1 U4.6 | length 21.6
  [L1] TOP w0.3: U4.6@123.77,104.865 125.285,104.865 R86.1@125.55,104.6 ; R86.1@125.65,104.6 125.75,104.5 125.75,104.476 126.401,103.825 130.124,103.825 130.849,104.55 D19.2@134.4,104.55 138.35,104.55 C27.1@138.4,104.6 142.4,104.6 J10.1@144,103
CAN_P: C22.2 D19.1 J10.2 R83.2 U4.7 | length 21.6
  [L1] TOP w0.3: U4.7@123.77,106.135 125.285,106.135 125.55,106.4 R83.2@125.6,106.4 ; R83.2@125.65,106.4 125.75,106.5 125.75,106.524 126.401,107.175 130.3,107.175 131.025,106.45 D19.1@134.4,106.45 138.35,106.45 C22.2@138.4,106.4 142.4,106.4 J10.2@144,108
CAN_RX: C26.1 U1.81 U4.4 | length 44.2
  [L1] TOP w0.3: U1.81@80.82,97.15 80.82,98.687 82.748,100.615 83.015,100.615 83.955,101.555 83.955,102.508 84.532,103.085 95.508,103.085 96.693,101.9 C26.1@118.9,101.9 118.83,101.97 U4.4@118.83,103.595
CAN_TX: C24.2 U1.82 U4.1 | length 47.4
  [L1] TOP w0.3: U1.82@80.32,97.15 80.32,98.627 80.32,98.894 82.541,101.115 82.808,101.115 83.455,101.762 83.455,102.715 84.325,103.585 95.715,103.585 96.4,102.9 110.753,102.9 116.953,109.1 C24.2@118.9,109.1 118.83,109.03 U4.1@118.83,107.405
COM0: J7.3 K1.NC | length 9.7
  [L4] BOTTOM w2: J7.3@5.5,121.7 7.5,123.7 13.1,123.7 K1.NC@14,124.6
COM1: J7.6 K3.NC | length 9.2
  [L4] BOTTOM w2: J7.6@5.5,106.7 7.3,108.5 K3.NC@14,108.5
COM2: J7.9 K5.NC | length 8.8
  [L4] BOTTOM w2: J7.9@5.5,91.7 13.3,91.7 K5.NC@14,92.4
COM3: J7.12 K7.NC | length 8.7
  [L4] BOTTOM w2: J7.12@5.5,76.7 5.662,76.7 6.062,76.3 K7.NC@14,76.3
COM4: J7.15 K2.NC | length 9.1
  [L4] BOTTOM w2: J7.15@5.5,61.7 12.5,61.7 K2.NC@14,60.2
COM5: J7.18 K4.NC | length 9.1
  [L4] BOTTOM w2: J7.18@6,46.7 11.4,46.7 K4.NC@14,44.1
COM6: J7.21 K6.NC | length 10
  [L4] BOTTOM w2: J7.21@5.5,31.7 8.5,31.7 12.2,28 K6.NC@14,28
COM7: J7.24 K8.NC | length 10.5
  [L4] BOTTOM w2: J7.24@5.5,16.7 10.3,11.9 K8.NC@14,11.9
DAC1_OUT1: C29.1 U1.29 U5.5 | length 22.7
  [L1] TOP w0.3: U5.5@56.054,78.175 56.054,80.43 56.224,80.6 v1(57.524,80.6) ; U1.29@72.82,82.05 72.82,80.115 73.1,79.835 v1(73.1,79.7)
  [L4] BOTTOM w0.3: v1(57.524,80.6) 57.612,80.6 58.169,81.157 63.599,81.157 64.056,80.7 72.1,80.7 v1(73.1,79.7)
DAC1_OUT2: C30.1 U1.30 U5.3 | length 22.5
  [L1] TOP w0.3: U5.3@58.594,78.175 58.594,80.47 C30.1@58.624,80.5 58.667,80.457 v1(59.667,80.457) ; U1.30@73.32,82.05 73.32,81.08 73.8,80.6 73.8,79.135 73.6,78.935 v1(73.6,78.8)
  [L4] BOTTOM w0.3: v1(59.667,80.457) 63.218,80.457 65.974,77.7 69.39,77.7 70.49,78.8 v1(73.6,78.8)
DADC0N: D13.3 R51.2 U1.43 | length 86.6
  [L1] TOP w0.3: U1.43@79.82,82.05 79.82,79.3 79.82,74.78 121.6,33 v1(121.6,27.1) ; v1(131.7,26.2) D13.3@133.4,26.2 133.4,26.515 133.25,26.665 133.11,26.665 132.7,27.075 R51.2@132.7,28
  [L4] BOTTOM w0.3: v1(121.6,27.1) 130.8,27.1 v1(131.7,26.2)
DADC0P: D11.3 R47.2 U1.42 | length 93.5
  [L1] TOP w0.3: U1.42@79.32,82.05 79.32,79.3 79.32,73.98 119.1,34.2 119.1,22.5 v1(120.2,21.4) ; v1(132.4,20) D11.3@133.4,20 133.4,20.315 133.25,20.465 133.11,20.465 132.7,20.875 R47.2@132.7,21.8
  [L4] BOTTOM w0.3: v1(120.2,21.4) 121.6,20 v1(132.4,20)
DADC1N: D16.3 R57.2 U1.46 | length 74.8
  [L1] TOP w0.3: U1.46@81.32,82.05 81.32,80.733 81.32,79.3 81.32,77.98 120.945,38.355 132.155,38.355 132.4,38.6 D16.3@133.4,38.6 133.4,38.915 133.25,39.065 133.11,39.065 132.7,39.475 R57.2@132.7,40.4
DADC1P: D15.3 R55.2 U1.45 | length 77.8
  [L1] TOP w0.3: U1.45@80.82,82.05 80.82,80.94 80.82,77.18 125.312,32.688 132.688,32.688 D15.3@133.25,32.688 ; R55.2@132.7,34.2 132.7,33.275 133.11,32.865 133.25,32.865 D15.3@133.339,32.776 ; D15.3@133.311,32.626 133.4,32.538 D15.3@133.4,32.4
DADC2N: D18.3 R61.2 U1.58 | length 72.5
  [L1] TOP w0.3: U1.58@84.87,87.1 89.931,87.1 91,86.031 91,74.414 114.414,51 132.4,51 D18.3@133.4,51 133.4,51.315 133.25,51.465 133.11,51.465 132.7,51.875 R61.2@132.7,52.8
DADC2P: D17.3 R59.2 U1.57 | length 74.6
  [L1] TOP w0.3: U1.57@84.87,86.6 85.62,86.6 87.11,86.6 89.324,86.6 90,85.924 90,74.707 119.207,45.5 129.6,45.5 130.3,44.8 D17.3@133.4,44.8 133.4,45.115 133.25,45.265 133.11,45.265 132.7,45.675 R59.2@132.7,46.6
DADC3N: D14.3 R52.2 U1.60 | length 68.3
  [L1] TOP w0.3: U1.60@84.87,88.1 91.3,88.1 93,86.4 93,73.828 103.428,63.4 132.4,63.4 D14.3@133.4,63.4 133.4,63.715 133.25,63.865 133.11,63.865 132.7,64.275 R52.2@132.7,65.2
DADC3P: D12.3 R48.2 U1.59 | length 70.4
  [L1] TOP w0.3: U1.59@84.87,87.6 90.6,87.6 92,86.2 92,74.121 108.921,57.2 132.4,57.2 D12.3@133.4,57.2 133.4,57.515 133.25,57.665 133.11,57.665 132.7,58.075 R48.2@132.7,59
DI0: OK1.4 R4.1 U1.5 | length 42.4
  [L1] TOP w0.3: OK1.4@52.9,124.94 v1(54.59,124.94) 56.28,124.94 R4.1@56.33,124.99 ; v1(68.093,93.693) 68.187,93.6 U1.5@69.77,93.6
  [L4] BOTTOM w0.3: v1(54.59,124.94) 54.59,108.317 64.8,98.107 65.6,97.307 65.6,95.509 67.32,93.789 67.998,93.789 v1(68.093,93.693)
DI1: OK3.4 R8.1 U1.4 | length 37.6
  [L1] TOP w0.3: OK3.4@62.3,124.94 v1(63.99,124.94) 65.68,124.94 R8.1@65.73,124.99 ; v1(67.846,95.3) 67.846,95.165 68.07,94.941 68.07,94.707 68.676,94.1 U1.4@69.77,94.1
  [L4] BOTTOM w0.3: v1(63.99,124.94) 63.99,99.91 66.846,97.054 66.846,95.911 67.361,95.396 67.75,95.396 v1(67.846,95.3)
DI2: OK5.4 R12.1 U1.3 | length 38.8
  [L1] TOP w0.3: v1(68.36,96.16) 68.456,96.064 68.456,95.68 68.57,95.566 68.57,94.914 68.884,94.6 U1.3@69.77,94.6 ; OK5.4@71.7,124.94 v1(73.39,124.94) 75.08,124.94 R12.1@75.13,124.99
  [L4] BOTTOM w0.3: v1(68.36,96.16) 68.36,96.247 66.1,98.507 66.1,99.9 66.1,107.29 73.39,114.58 v1(73.39,124.94)
DI3: OK7.4 R16.1 U1.1 | length 38.5
  [L1] TOP w0.3: v1(69.4,97.1) 69.4,96.965 69.77,96.595 U1.1@69.77,95.6 ; OK7.4@81.1,124.94 v1(82.79,124.94) 84.48,124.94 R16.1@84.53,124.99
  [L4] BOTTOM w0.3: v1(69.4,97.1) 69.4,107.6 82.79,120.99 v1(82.79,124.94)
DI4: OK9.4 R20.1 U1.2 | length 45.7
  [L1] TOP w0.3: U1.2@69.77,95.1 70.656,95.1 70.97,95.414 70.97,95.995 70.277,96.688 70.277,97.723 v1(70.2,97.8) ; OK9.4@90.5,124.94 v1(92.19,124.94) 93.88,124.94 R20.1@93.93,124.99
  [L4] BOTTOM w0.3: v1(70.2,97.8) 70.146,97.854 70.146,99.9 70.146,101.817 70,101.963 70,105.79 78.7,114.49 78.89,114.49 89.34,124.94 v1(92.19,124.94)
DI5: OK2.4 R6.1 U1.98 | length 50.2
  [L1] TOP w0.3: v1(72.3,102.7) 72.32,102.68 U1.98@72.32,97.15 ; OK2.4@99.9,124.615 OK2.4@99.9,124.94 v1(101.59,124.94) 103.28,124.94 R6.1@103.33,124.99
  [L4] BOTTOM w0.3: v1(72.3,102.7) 72.292,102.708 72.292,106.692 86.69,121.09 97.74,121.09 v1(101.59,124.94)
DI6: OK4.4 R10.1 U1.97 | length 58.7
  [L1] TOP w0.3: U1.97@72.82,97.15 72.82,101.645 73.02,101.845 v1(73.02,101.98) ; OK4.4@109.3,124.615 OK4.4@109.3,124.94 v1(110.99,124.94) 112.68,124.94 R10.1@112.73,124.99
  [L4] BOTTOM w0.3: v1(73.02,101.98) 73.02,106.32 82,115.3 84.39,115.3 86.19,117.1 98.09,117.1 105.93,124.94 v1(110.99,124.94)
DI7: OK6.4 R14.1 U1.88 | length 66.8
  [L1] TOP w0.3: v1(77.035,98.9) 77.035,98.765 77.32,98.48 U1.88@77.32,97.15 ; OK6.4@118.7,124.94 v1(120.39,124.94) 122.08,124.94 R14.1@122.13,124.99
  [L4] BOTTOM w0.3: v1(77.035,98.9) 75.3,100.635 75.3,107.3 82.49,114.49 97.62,114.49 100.23,117.1 104.43,117.1 108.42,121.09 116.54,121.09 v1(120.39,124.94)
DI8: OK8.4 R18.1 U1.87 | length 74.4
  [L1] TOP w0.3: v1(77.148,99.927) 77.148,99.857 77.82,99.185 U1.87@77.82,97.15 ; OK8.4@128.1,124.615 OK8.4@128.1,124.94 v1(129.79,124.94) 131.48,124.94 R18.1@131.53,124.99
  [L4] BOTTOM w0.3: v1(77.148,99.927) 76.335,100.74 76.335,103.129 78.305,105.099 78.305,107.645 84.46,113.8 103.5,113.8 106.8,117.1 115.1,117.1 119.09,121.09 125.94,121.09 v1(129.79,124.94)
DI9: OK10.4 R22.1 U1.86 | length 83
  [L1] TOP w0.3: v1(77.7,100.7) 78.32,100.08 U1.86@78.32,97.15 ; OK10.4@136.85,124.29 OK10.4@137.5,124.94 137.54,124.9 140.84,124.9 R22.1@140.93,124.99
  [L4] BOTTOM w0.3: v1(77.7,100.7) 77.714,100.7 78.805,101.791 78.805,107.438 82.767,111.4 108.69,111.4 111.59,114.3 122.3,114.3 129.09,121.09 135.39,121.09 v1(139.2,124.9)
DO0: R23.2 U1.15 | length 64.6
  [L1] TOP w0.3: R23.2@43.4,132.2 v1(44.6,132.2) ; v1(64.146,88.7) 64.241,88.604 64.524,88.604 64.529,88.6 65.146,88.6 U1.15@69.77,88.6
  [L4] BOTTOM w0.3: v1(44.6,132.2) 44.6,118 51.5,111.1 51.5,91.5 54.7,88.3 62.6,88.3 63,88.7 v1(64.146,88.7)
DO1: R29.2 U1.16 | length 50.5
  [L1] TOP w0.3: R29.2@43.4,116.1 v1(44.6,116.1) ; v1(64.8,87.8) 64.935,87.8 65.235,88.1 U1.16@69.77,88.1
  [L4] BOTTOM w0.3: v1(44.6,116.1) 44.6,102 49.2,97.4 49.2,91.8 54.1,86.9 62.194,86.9 62.794,87.5 63.94,87.5 63.948,87.508 64.374,87.508 64.667,87.8 v1(64.8,87.8)
DO2: R35.2 U1.17 | length 37.1
  [L1] TOP w0.3: R35.2@43.4,100 v1(44.6,100) ; v1(65.8,87.3) 65.896,87.396 66.456,87.396 66.66,87.6 U1.17@69.77,87.6
  [L4] BOTTOM w0.3: v1(44.6,100) 44.6,92.5 50.992,86.108 64.608,86.108 v1(65.8,87.3)
DO3: R41.2 U1.18 | length 27.7
  [L1] TOP w0.3: R41.2@43.4,83.9 v1(44.6,83.9) ; v1(66.8,86.75) 66.935,86.75 67.285,87.1 U1.18@69.77,87.1
  [L4] BOTTOM w0.3: v1(44.6,83.9) 54.4,83.9 55.7,85.2 65.25,85.2 v1(66.8,86.75)
DO4: R24.2 U1.19 | length 37.1
  [L1] TOP w0.3: R24.2@43.4,67.8 v1(44.6,67.8) ; v1(67.733,86.4) 67.868,86.4 68.068,86.6 U1.19@69.77,86.6
  [L4] BOTTOM w0.3: v1(44.6,67.8) 44.6,72.79 56.157,84.347 65.68,84.347 v1(67.733,86.4)
DO5: R30.2 U1.23 | length 52.7
  [L1] TOP w0.3: R30.2@43.4,51.7 v1(44.6,51.7) ; v1(61.8,61.1) 62.9,61.1 65.6,63.8 65.6,73.5 68.3,76.2 68.3,80.5 70.97,83.17 70.97,84.286 70.656,84.6 U1.23@69.77,84.6
  [L4] BOTTOM w0.3: v1(44.6,51.7) 44.6,54.1 51.6,61.1 v1(61.8,61.1)
DO6: R36.2 U1.24 | length 60.9
  [L1] TOP w0.3: R36.2@43.4,35.6 43.425,35.6 52.849,45.024 52.849,56.264 58.703,62.117 60.327,62.117 64.7,66.49 64.7,73.8 67.521,76.621 67.521,81.863 68.477,82.819 68.477,83.694 68.884,84.1 U1.24@69.77,84.1
DO7: R42.2 U1.27 | length 86.6
  [L1] TOP w0.3: R42.2@43.4,19.5 64.2,19.5 66.6,21.9 66.6,73.255 71.146,77.801 71.146,80.599 71.397,80.85 71.506,80.85 71.82,81.164 U1.27@71.82,82.05
E0+: U1.93 U3.2 | length 44.4
  [L1] TOP w0.3: U1.93@74.82,97.15 74.82,98.31 75.22,98.71 75.22,99.29 75.1,99.41 75.1,107.9 76.1,108.9 92,108.9 96.552,104.348 104.893,104.348 105.46,104.915 U3.2@105.46,105.499
E0-: U1.92 U3.12 | length 49.9
  [L1] TOP w0.3: U1.92@75.32,97.15 75.32,98.103 75.72,98.503 75.72,107.62 76.4,108.3 91.707,108.3 96.307,103.7 105.203,103.7 106.163,104.661 106.163,109.53 106.73,110.097 U3.12@106.73,110.681
E0_+: OK20.4 R64.1 U3.1 | length 20.7
  [L1] TOP w0.3: R64.1@93.93,113.59 90.55,113.59 OK20.4@90.5,113.54 90.5,113.215 91.15,112.565 94.079,112.565 101.145,105.499 U3.1@104.19,105.499
E0_-: OK23.4 R70.1 U3.13 | length 10.5
  [L1] TOP w0.3: OK23.4@99.9,113.54 99.9,113.215 100.55,112.565 104.16,112.565 105.46,111.265 U3.13@105.46,110.681 ; OK23.4@100.2,113.515 100.2,113.59 R70.1@103.33,113.59
E1+: U1.66 U3.4 | length 29.8
  [L1] TOP w0.3: U1.66@84.87,91.1 85.756,91.1 86.304,91.648 86.304,92.304 v1(86.4,92.4) ; v1(106.5,103.9) 106.596,103.996 107.081,103.996 108,104.915 U3.4@108,105.499
  [L4] BOTTOM w0.3: v1(86.4,92.4) 86.535,92.4 86.835,92.7 92,92.7 103.2,103.9 v1(106.5,103.9)
E1-: U1.65 U3.10 | length 35.7
  [L1] TOP w0.3: U1.65@84.87,90.6 86.135,90.6 87.1,91.565 v1(87.1,91.7) ; v1(109.2,109.1) 109.235,109.135 109.235,110.646 U3.10@109.27,110.681
  [L4] BOTTOM w0.3: v1(87.1,91.7) 87.235,91.7 87.435,91.9 95.5,91.9 108.6,105 108.6,108.498 v1(109.2,109.1) v1(109.2,109.1)
E1_+: OK26.4 R76.1 U3.3 | length 12.8
  [L1] TOP w0.3: U3.3@106.73,105.499 106.73,106.083 107.333,106.687 107.333,111.556 107.82,112.042 108.127,112.042 109.3,113.215 OK26.4@109.3,113.54 ; OK26.4@109.33,113.57 OK26.4@109.3,113.54 ; R76.1@112.73,113.59 112.68,113.54 OK26.4@109.3,113.54
E1_-: OK28.4 R80.1 U3.11 | length 16.4
  [L1] TOP w0.3: U3.11@108,110.681 108,111.265 108.117,111.382 108.429,111.382 108.879,111.832 110.712,111.832 111.212,112.332 114.298,112.332 114.929,111.7 117.185,111.7 118.7,113.215 OK28.4@118.7,113.54 122.08,113.54 R80.1@122.13,113.59
E2+: U1.64 U3.6 | length 32.8
  [L1] TOP w0.3: U1.64@84.87,90.1 86.7,90.1 87.795,91.195 v1(87.905,91.195) ; v1(110.2,103.9) 110.2,104.035 110.423,104.259 110.423,105.383 U3.6@110.54,105.499
  [L4] BOTTOM w0.3: v1(87.905,91.195) 96.195,91.195 108.85,103.85 110.15,103.85 v1(110.2,103.9)
E2-: U1.63 U3.8 | length 39.9
  [L1] TOP w0.3: U1.63@84.87,89.6 87.298,89.6 87.898,90.2 v1(87.9,90.2) ; v1(111.8,109.1) 111.805,109.105 111.805,110.676 U3.8@111.81,110.681
  [L4] BOTTOM w0.3: v1(87.9,90.2) 97.49,90.2 112.5,105.21 112.5,108.4 v1(111.8,109.1)
E2_+: OK21.4 R65.1 U3.5 | length 28.2
  [L1] TOP w0.3: U3.5@109.27,105.499 109.285,105.514 109.285,107.085 v1(109.3,107.1) ; v1(128.1,111.7) OK21.4@128.1,113.54 131.48,113.54 R65.1@131.53,113.59
  [L4] BOTTOM w0.3: v1(109.3,107.1) 109.3,108.1 112.9,111.7 v1(128.1,111.7)
E2_-: OK24.4 R71.1 U3.9 | length 32.8
  [L1] TOP w0.3: U3.9@110.54,110.681 110.54,111.215 110.657,111.332 110.919,111.332 111.419,111.832 114.091,111.832 114.922,111 135.285,111 137.5,113.215 OK24.4@137.5,113.54 137.55,113.59 139.03,113.59 R71.1@140.93,113.59